# Altium PCB DS131-1.0-ApH传感器.PcbDoc
Units mm, origin at the board's own origin, x right, y up, seen from the top; angles counter-clockwise.
Board outline 41 x 64 mm, 2 copper layers (Top Layer, Bottom Layer), stack 1.581 mm thick; 37 components, 37 nets, 183 pads, 131 vias.
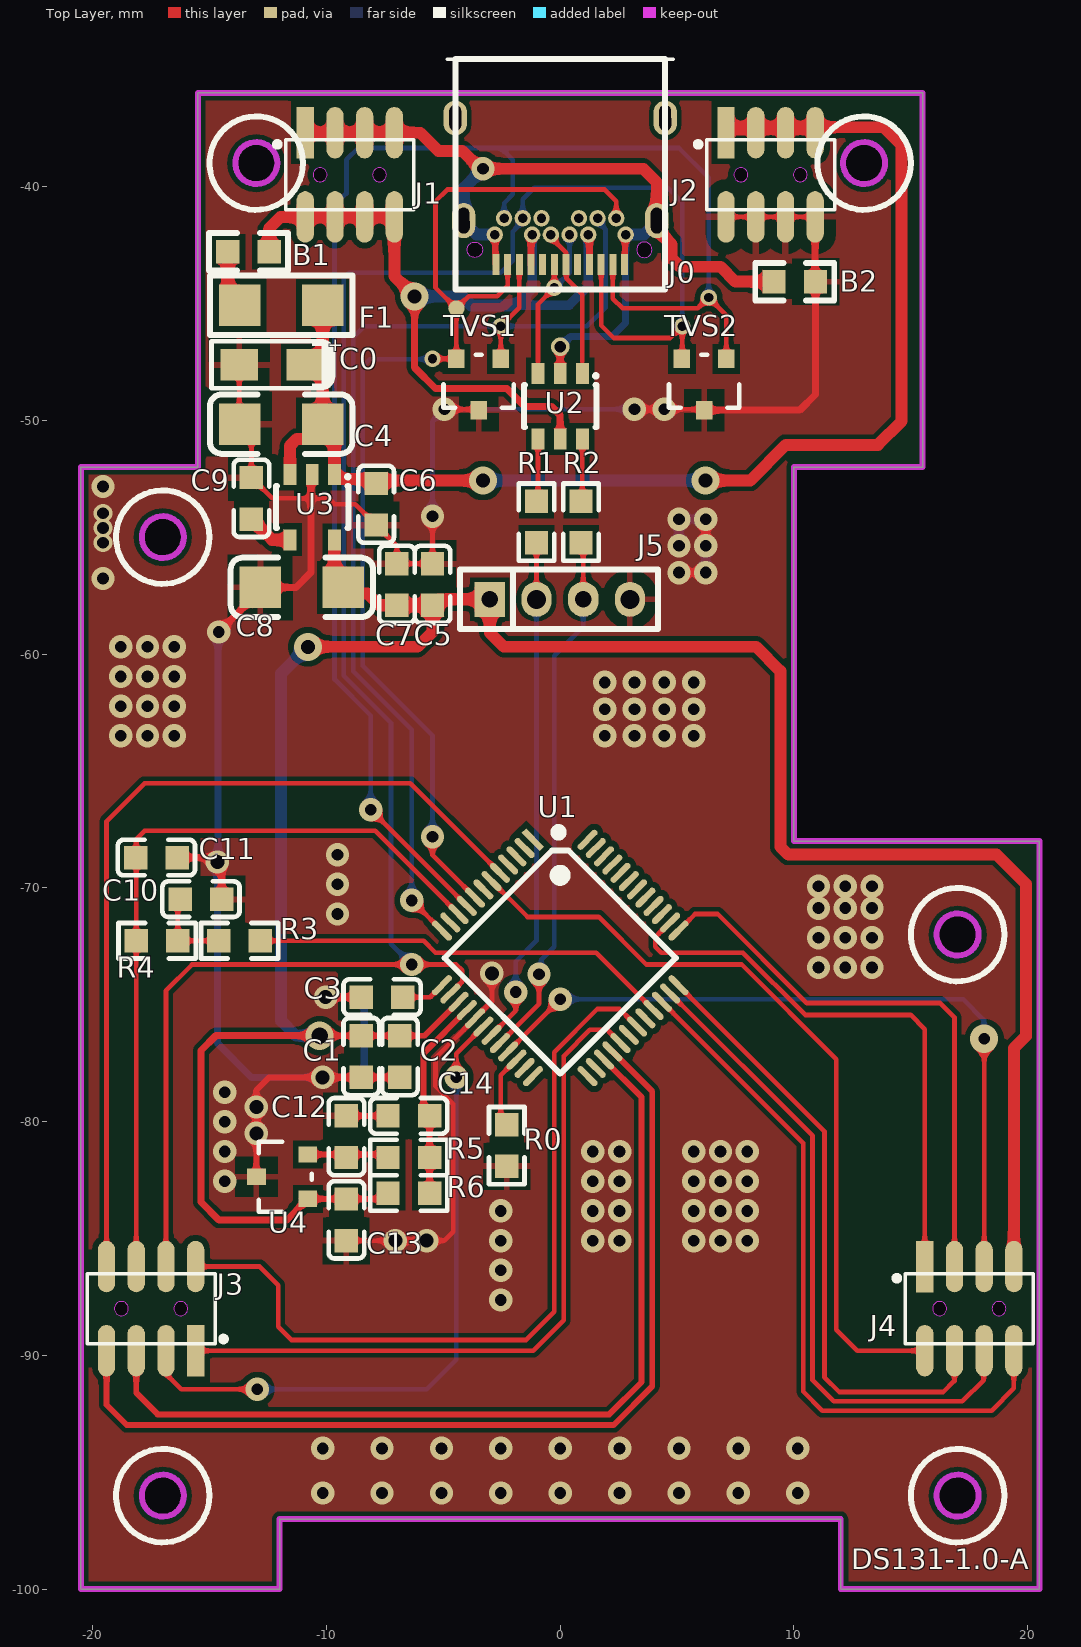
[diagram p0: Top Layer view]
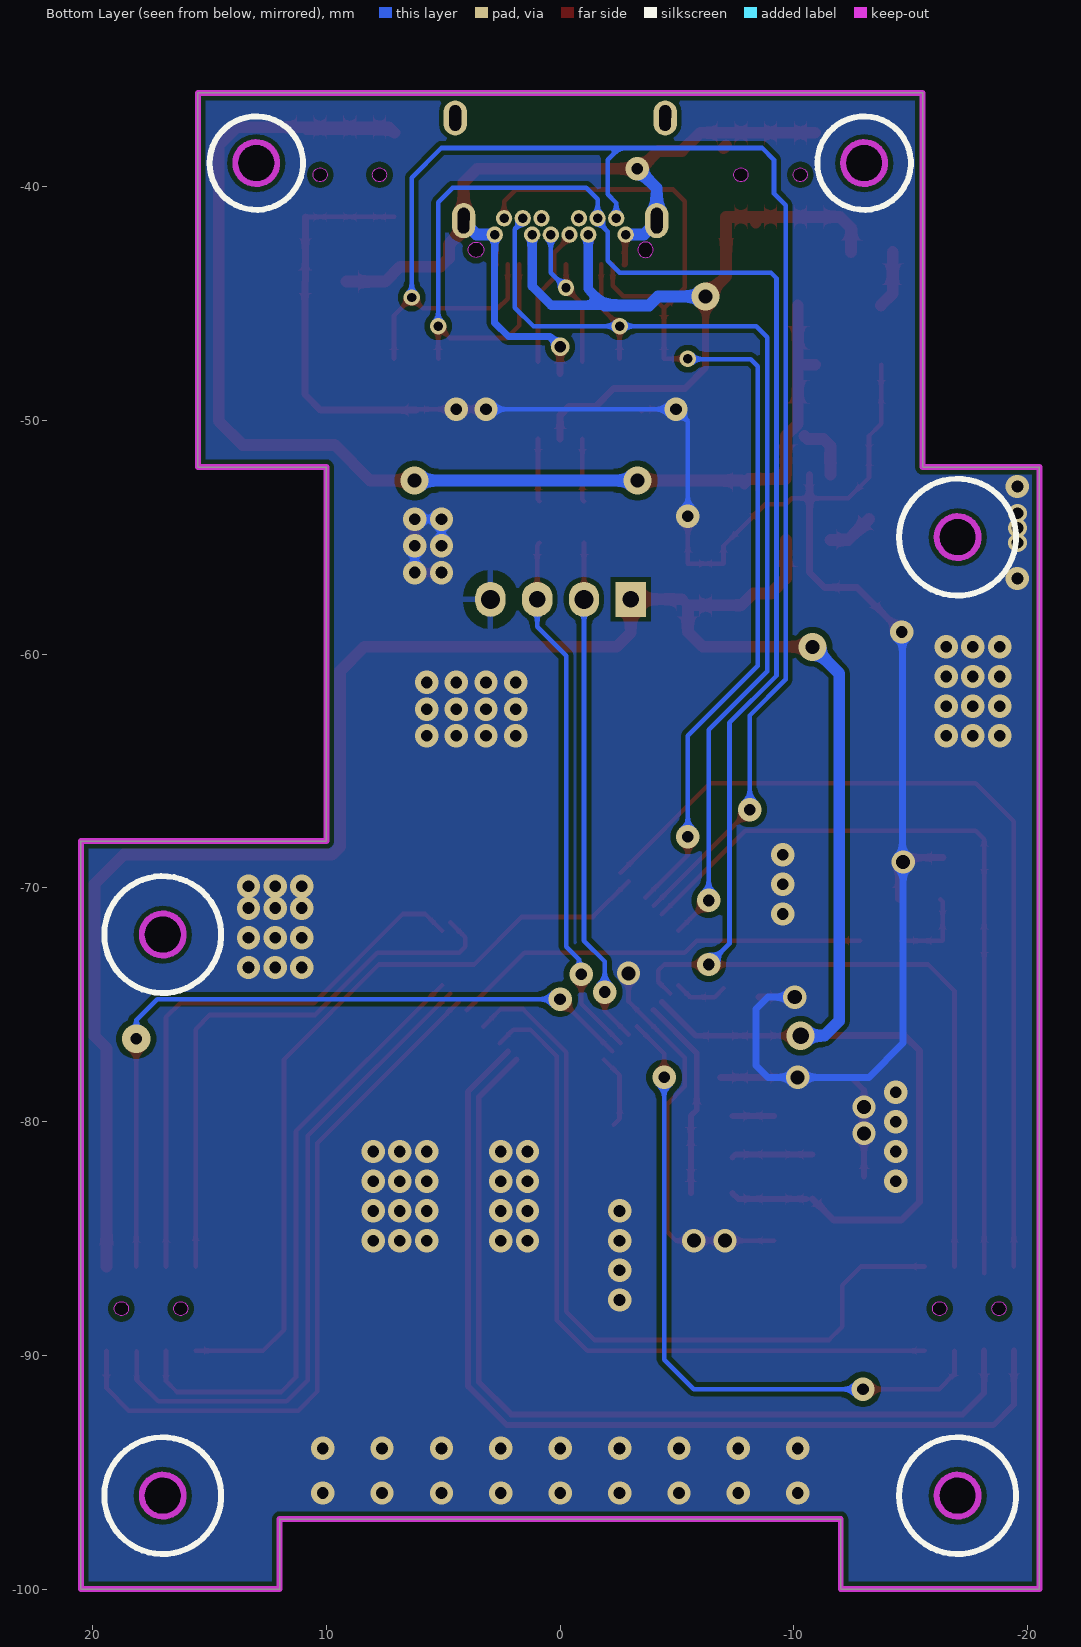
[diagram p1: Bottom Layer view, seen from below]
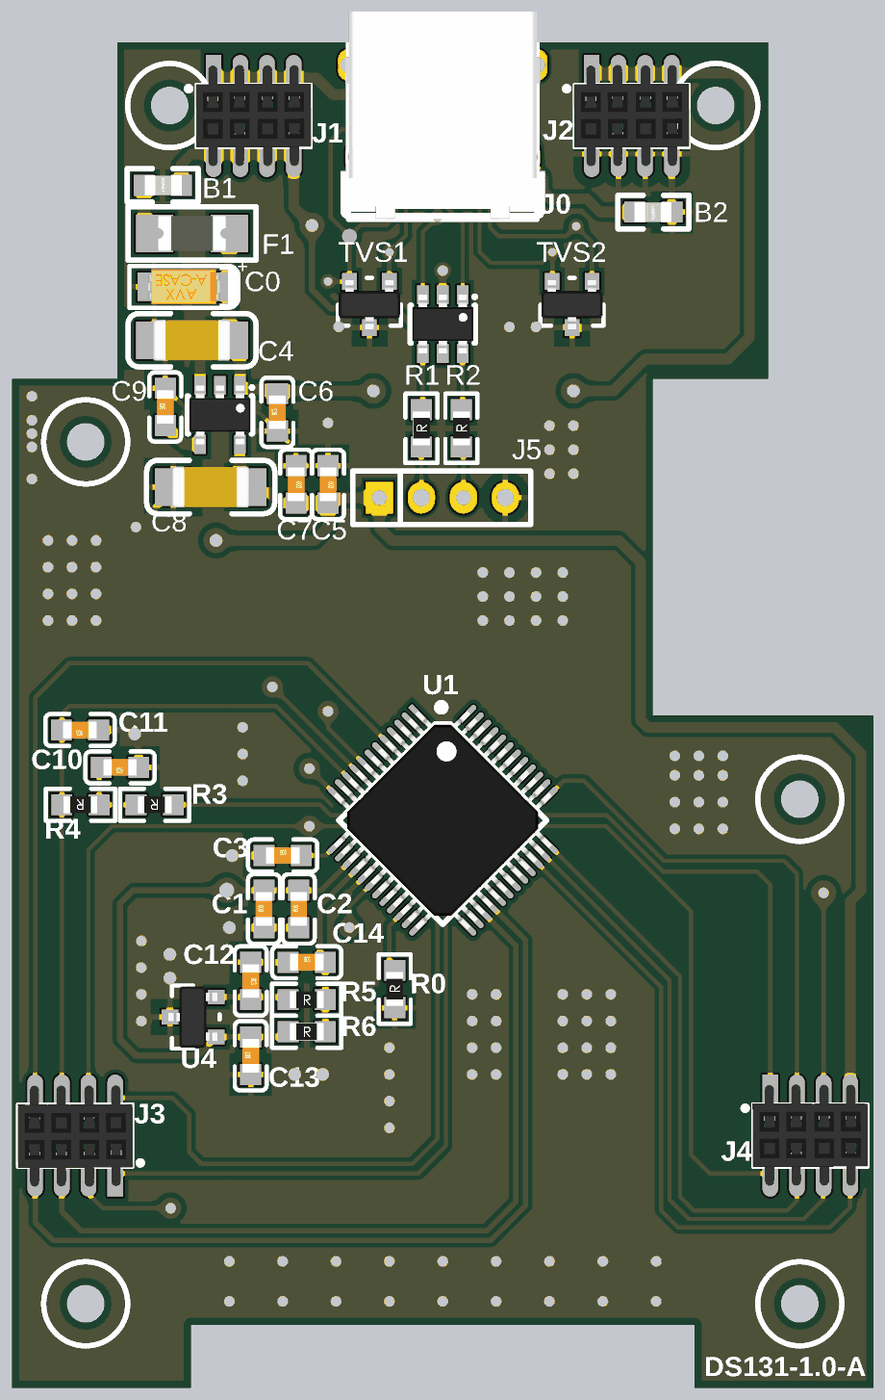
[diagram p2: 3D render of the assembled board from above, using the file's embedded part models]

## Layer stack, top to bottom
Top Solder: solder mask 0.0102, Solder Resist, Dk 3.5
Top Layer: signal copper 0.0356
Dielectric 1: dielectric 1.51, FR-4, Dk 4.8
Bottom Layer: signal copper 0.0356
Bottom Solder: solder mask 0.0102, Solder Resist, Dk 3.5

## Board outline
-20.5,-100 -20.5,-52 -15.5,-52 -15.5,-36 15.5,-36 15.5,-52 10,-52 10,-68 20.5,-68 20.5,-100 12,-100 12,-97 -12,-97 -12,-100
cut-out: -17.9,-55 ccw(c-17,-55) -17,-55.9 ccw(c-17,-55) -16.1,-55 ccw(c-17,-55) -17,-54.1 ccw(c-17,-55)
cut-out: 16.1,-96 ccw(c17,-96) 17,-96.9 ccw(c17,-96) 17.9,-96 ccw(c17,-96) 17,-95.1 ccw(c17,-96)
cut-out: -17.9,-96 ccw(c-17,-96) -17,-96.9 ccw(c-17,-96) -16.1,-96 ccw(c-17,-96) -17,-95.1 ccw(c-17,-96)
cut-out: 16.1,-72 ccw(c17,-72) 17,-72.9 ccw(c17,-72) 17.9,-72 ccw(c17,-72) 17,-71.1 ccw(c17,-72)
cut-out: 12.1,-39 ccw(c13,-39) 13,-39.9 ccw(c13,-39) 13.9,-39 ccw(c13,-39) 13,-38.1 ccw(c13,-39)
cut-out: -13.9,-39 ccw(c-13,-39) -13,-39.9 ccw(c-13,-39) -12.1,-39 ccw(c-13,-39) -13,-38.1 ccw(c-13,-39)

## Design rules (kind name [scope] priority, off if disabled: settings)
Clearance [All] p1: gap=0.254 ignorepadtopadclearanceinfootprint=FALSE except(0: Arc-Hole Track-Hole SMDPad-Hole THPad-Hole Via-Hole Fill-Hole Poly-Hole Region-Hole Text-Hole; 0.12: THPad-THPad; 0.15: Arc-SMDPad Arc-THPad Track-SMDPad Track-THPad SMDPad-SMDPad; 0.2: Arc-Arc Arc-Track Arc-Via Arc-Fill Arc-Poly Arc-Region Arc-Text Track-Track Track-Via Track-Fill Track-Poly Track-Region Track-Text SMDPad-THPad SMDPad-Text THPad-Fill THPad-Poly THPad-Region)
MinimumSolderMaskSliver [All] p1: minsoldermaskwidth=0.2
PlaneConnect [All] p1: planeconnectstyle=Relief reliefexpansion=0.508 reliefentries=4 reliefconductorwidth=0.254 reliefairgap=0.508
PolygonConnect GND [All] p1: thpad.connectstyle=Relief thpad.reliefconductorwidth=0.254 thpad.reliefentries=4 thpad.polygonreliefangle="90 Angle" thpad.airgapwidth=0.508 smdpad.connectstyle=Relief smdpad.reliefconductorwidth=0.254 smdpad.reliefentries=4 smdpad.polygonreliefangle="90 Angle" smdpad.airgapwidth=0.508 via.connectstyle=Direct via.reliefconductorwidth=0.254 via.reliefentries=4 via.polygonreliefangle="90 Angle" via.airgapwidth=0.254
PolygonConnect VSS [InNet('VSS') vs InNet('VSS')] p2: thpad.connectstyle=Relief thpad.reliefconductorwidth=0.508 thpad.reliefentries=4 thpad.polygonreliefangle="90 Angle" thpad.airgapwidth=0.508 smdpad.connectstyle=Relief smdpad.reliefconductorwidth=0.508 smdpad.reliefentries=4 smdpad.polygonreliefangle="90 Angle" smdpad.airgapwidth=0.508 via.connectstyle=Direct via.reliefconductorwidth=0.508 via.reliefentries=4 via.polygonreliefangle="90 Angle" via.airgapwidth=0.254
RoutingVias [All] p1: holewidth=0.6 width=1 viastyle="Through Hole" minholewidth=0.4 minwidth=0.8 maxholewidth=1 maxwidth=2
SilkToSilkClearance [All] p1: silktosilkclearance=0.1
SilkToSolderMaskClearance [IsPad] p1: minsilkscreentomaskgap=0.05 clearancetoexposedcopper=TRUE
SolderMaskExpansion [All] p1: expansion=0.102 istentingtop=FALSE
Width [All] p1: maxlimit=1 minlimit=0.2 preferedwidth=0.2
26 further rules are at their usual default settings.

## Classes and differential pairs
net class C14_Nets: ADC_Vref GND
net class U4_Nets: GND VCC_3V3_MCU VDD_2V5
net class R6_Nets: ADC_Vref VCC_3V3_MCU
net class R5_Nets: ADC_Vref VDD_2V5
net class C13_Nets: GND VCC_3V3_MCU
net class C12_Nets: GND VDD_2V5
net class R0_Nets: GND P3.3
net class C0_Nets: GND VCC_5V
net class J2_Nets: Dis_red_EN GND VCC_5V
net class U1_Nets: ADC0 ADC1 ADC_Vref DAC_OUT Dis1_red_EN Dis2_green_EN Dis3_blue_EN GND I2C1_SCL I2C1_SDA KEY_HOME NetU1_7 NetU1_10 P3.0/D-/RxD P3.1/D+/TxD P3.3 PWM SPI1/SPI2_CS SPI1_MISO SPI1_MOSI SPI1_SCK SPI2_MISO SPI2_MOSI SPI2_SCK UCAP USART2_RXD USART2_TXD VCC_3V3_MCU
net class TVS2_Nets: GND SPI1/SPI2_CS SPI1_SCK
net class J4_Nets: ADC1 Dis1_red_EN Dis2_green_EN Dis3_blue_EN I2C1_SCL I2C1_SDA KEY_HOME VCC_3V3_MCU
net class J0_Nets: D+_I/O1 D-_I/O2 NetJ0_A5 NetJ0_A8 NetJ0_B5 NetJ0_B8 SPI1/SPI2_CS SPI1_MISO SPI1_MOSI SPI1_SCK VBUS VSS
net class F1_Nets: NetB1_2 VCC_5V
net class C7_Nets: GND VCC_3V3_MCU
net class C4_Nets: GND VCC_5V
net class B2_Nets: GND VSS
net class B1_Nets: NetB1_2 VBUS
net class J3_Nets: ADC0 DAC_OUT SPI1/SPI2_CS SPI2_MISO SPI2_MOSI SPI2_SCK USART2_RXD USART2_TXD
net class U3_Nets: GND NetC9_1 VCC_3V3_MCU VCC_5V
net class R4_Nets: DAC_OUT NetC10_2
net class R2_Nets: P3.1/D+/TxD USB_D+
net class R1_Nets: P3.0/D-/RxD USB_D-
net class R3_Nets: NetC10_2 PWM
net class J1_Nets: VBUS VSS
net class J5_Nets: GND P3.0/D-/RxD P3.1/D+/TxD VCC_3V3_MCU
net class U2_Nets: D+_I/O1 D-_I/O2 USB_D+ USB_D- VBUS VSS
net class TVS1_Nets: GND SPI1_MISO SPI1_MOSI
net class C10_Nets: GND NetC10_2
net class C3_Nets: GND UCAP
net class C1_Nets: GND VCC_3V3_MCU
net class C5_Nets: GND VCC_3V3_MCU
net class C11_Nets: DAC_OUT GND
net class C9_Nets: GND NetC9_1
net class C8_Nets: GND VCC_3V3_MCU
net class C6_Nets: GND VCC_5V
net class C2_Nets: GND VCC_3V3_MCU

## Components (designator, comment, footprint, x,y, rotation, side; value= is the part's Value field where it differs from the comment)
B1 "CBM160808U102" 0603Bead -13.335,-42.799 r180 top
B2 "CBM160808U102" 0603Bead 10.033,-44.069 r0 top
C0 "AVX_10uF/16V ±10％(C106)" AVX_3216-18(1206)_SMD -12.319,-47.625 r180 top value=10uF
C1 "SMDCAP00013" 0603CAP -8.509,-77.217 r90 top value=100nF
C2 "SMDCAP00012" 0603CAP -6.858,-77.217 r90 top value=4.7uF
C3 "SMDCAP00015" 0603CAP -7.62,-74.676 r0 top value=1uF
C4 "MLCC 10uF 50V ±20％ 1206" 1206CAP -11.938,-50.165 r0 top value=10uF
C5 "SMDCAP00013" 0603CAP -5.461,-57.022 r270 top value=100nF
C6 "SMDCAP00015" 0603CAP -7.874,-53.593 r90 top value=1uF
C7 "SMDCAP00015" 0603CAP -6.985,-57.022 r270 top value=1uF
C8 "MLCC 10uF 50V ±20％ 1206" 1206CAP -11.049,-57.149 r0 top value=10uF
C9 "SMDCAP00010" 0603CAP -13.208,-53.34 r90 top value=10nF
C10 "SMDCAP00013" 0603CAP -15.366,-70.485 r180 top value=100nF
C11 "SMDCAP00013" 0603CAP -17.272,-68.707 r180 top value=100nF
C12 "SMDCAP00013" 0603CAP -9.144,-80.644 r270 top value=100nF
C13 "SMDCAP00013" 0603CAP -9.144,-84.202 r90 top value=100nF
C14 "SMDCAP00013" 0603CAP -6.477,-79.756 r0 top value=100nF
F1 "SMD1206-050C-16V" 1206FUSE -11.938,-45.085 r0 top value="16V /0.5A"
J0 "USB_Type_C_24P" USB_TYPE_C_24P_Receptacle 0,-40.2 r180 top locked
J1 "X1321FVS-2x04-C43D48" X1321FVS-2X04-C43D48 -9,-39.5 r0 top locked value=2*4P
J2 "X1321FVS-2x04-C43D48" X1321FVS-2X04-C43D48 9,-39.5 r0 top locked value=2*4P
J3 "X1321FVS-2x04-C43D48" X1321FVS-2X04-C43D48 -17.5,-88 r180 top locked value=2*4P
J4 "X1321FVS-2x04-C43D48" X1321FVS-2X04-C43D48 17.5,-88 r0 top locked value=2*4P
J5 "DIP4单排直针  间距2mm 针长11mm 铜" H4 -3.016,-57.658 r0 top value=4P
R0 "Chip 0R 1/16W ±1％ 0603" 0603RES -2.286,-81.026 r90 top value=0R
R1 "Chip 22R 1/16W ±1％ 0603" 0603RES -1.016,-54.356 r90 top value=22R
R2 "Chip 22R 1/16W ±1％ 0603" 0603RES 0.889,-54.356 r90 top value=22R
R3 "SMDRES00090" 0603RES -13.716,-72.263 r180 top value=3.3K
R4 "SMDRES00090" 0603RES -17.246,-72.263 r180 top value=3.3K
R5 "Chip 0R 1/16W ±1％ 0603" 0603RES -6.477,-81.534 r0 top value=0R
R6 "Chip 0R 1/16W ±1％ 0603" 0603RES -6.477,-83.058 r0 top value=0R
TVS1 "MMBZ9V1A" SOT23 -3.49,-48.471 r180 top
TVS2 "MMBZ9V1A" SOT23 6.157,-48.471 r180 top
U1 "STC32G12K128_35I LQFP48" LQFP-48 0,-73 r315 top locked value=STC32G12K128
U2 "82400102" SOT23-6 0,-49.4 r180 top
U3 "ME6211C33M5G-N" SOT23-5 -10.607,-53.717 r180 top
U4 "REF3025" SOT23 -11.895,-82.357 r90 top value=丝印R30C

## Footprints (in the part's own frame and the unit in brackets; to place one, negate y for a bottom-side part, rotate by r counter-clockwise, add the part's x,y. Pads: shape width x height; smd on the part's side, far side on the other; paste and mask are expansions set on the pad)
0603Bead [mm]
  rect 1x1 smd: 1(-0.889,0) 2(0.889,0)
  silkscreen extent -1.69,-0.8 1.69,0.8, body extent -0.9,-0.48 0.85,0.48, height 0.95
0603CAP [mm]
  rect 1x1 smd: 1(-0.889,0) 2(0.89,0)
  silkscreen extent -1.65,-0.76 1.65,0.76, body extent -0.8,-0.4 0.8,0.4, height 0.3
0603RES [mm]
  rect 1x1 smd: 1(-0.889,0) 2(0.889,0)
  silkscreen extent -1.65,-0.76 1.65,0.76, body extent -0.8,-0.41 0.8,0.41, height 0.51
1206CAP [mil]
  rect 70x70 smd: 1(-70,0) 2(70,0)
  silkscreen extent -120,-50 120,50, body extent -73,-38 73,38, height 47
1206FUSE [mil]
  rect 70x70 smd: 1(-70,0) 2(70,0)
  silkscreen extent -120,-50 120,50, body extent -63,-33 63,33, height 57
AVX_3216-18(1206)_SMD [mm]
  rect 1.6x1.35 smd: 1(-1.41,0) 2(1.41,0)
  silkscreen extent -2.6,-1 2.6,1, body extent -1.7,-0.84 1.7,0.84, height 1.71
H4 [mm]
  rect 1.3x1.5 hole 0.7: 1(0,0)
  oval 1.3x1.5 hole 0.813: 2(2,0) 4(6,0)
  oval 1.3x1.5 hole 0.7: 3(4,0)
  silkscreen extent -1.27,-1.27 7.2,1.27
LQFP-48 [mm]
  rect 1.1x0.27 smd mask+0.08: 1(-4.4,2.75)
  oval 1.1x0.27 smd mask+0.08: 2(-4.4,2.25) 3(-4.4,1.75) 4(-4.4,1.25) 5(-4.4,0.75) 6(-4.4,0.25) 7(-4.4,-0.25) 8(-4.4,-0.75) 9(-4.4,-1.25) 10(-4.4,-1.75) 11(-4.4,-2.25) 12(-4.4,-2.75) 25(4.4,-2.75) 26(4.4,-2.25) 27(4.4,-1.75) 28(4.4,-1.25) 29(4.4,-0.75) 30(4.4,-0.25) 31(4.4,0.25) 32(4.4,0.75) 33(4.4,1.25) 34(4.4,1.75) 35(4.4,2.25) 36(4.4,2.75)
  oval 0.27x1.1 smd mask+0.08: 13(-2.75,-4.4) 14(-2.25,-4.4) 15(-1.75,-4.4) 16(-1.25,-4.4) 17(-0.75,-4.4) 18(-0.25,-4.4) 19(0.25,-4.4) 20(0.75,-4.4) 21(1.25,-4.4) 22(1.75,-4.4) 23(2.25,-4.4) 24(2.75,-4.4) 37(2.75,4.4) 38(2.25,4.4) 39(1.75,4.4) 40(1.25,4.4) 41(0.75,4.4) 42(0.25,4.4) 43(-0.25,4.4) 44(-0.75,4.4) 45(-1.25,4.4) 46(-1.75,4.4) 47(-2.25,4.4) 48(-2.75,4.4)
  silkscreen extent -3.95,-3.5 3.5,3.85, body extent -4.51,-4.5 4.5,4.5, height 1.54
SOT23 [mm]
  rect 0.7x0.8 smd: 1(-0.95,-1.1) 2(0.95,-1.1) 3(0,1.1)
  silkscreen extent -1.5,-1.27 1.5,1, body extent -1.46,-1.17 1.46,1.17, height 1
SOT23-5 [mm] "SOT-23/SC-74A; 5 Leads; Body 3.1 x 3 mm, inc. leads (LxW max)"
  rect 0.55x0.9 smd: 1(-0.95,-1.4) 2(0,-1.4) 3(0.95,-1.4) 4(0.95,1.4) 5(-0.95,1.4)
  silkscreen extent -1.59,-1.36 1.55,0.9, body extent -1.45,-1.4 1.45,1.4, height 1.45
SOT23-6 [mm] "SOT-23/SC-74A; 5 Leads; Body 3.1 x 3 mm, inc. leads (LxW max)"
  rect 0.55x0.9 smd: 1(-0.95,-1.4) 2(0,-1.4) 3(0.95,-1.4) 4(0.95,1.4) 5(0,1.4) 6(-0.95,1.4)
  silkscreen extent -1.59,-1.36 1.55,0.9, body extent -1.45,-1.4 1.45,1.4, height 1.45
USB_TYPE_C_24P_Receptacle [mm]
  oval 1x1.5 hole 0.5 slot 1.1 at 90.5 deg: 0(-4.49,-3.13) 0(-4.13,1.26) 0(4.13,1.26) 0(4.49,-3.13)
  rect 0.3x0.9 smd mask+0.1: A1(-2.75,3.13) A2(-2.25,3.13) A3(-1.75,3.13) A4(-1.25,3.13) A5(-0.75,3.13) A6(-0.25,3.13) A7(0.25,3.13) A8(0.75,3.13) A9(1.25,3.13) A10(1.75,3.13) A11(2.25,3.13) A12(2.75,3.13)
  round 0.7 hole 0.4: B1(2.8,1.86) B2(2.4,1.16) B3(1.6,1.16) B4(1.2,1.86) B5(0.8,1.16) B6(0.4,1.86) B7(-0.4,1.86) B8(-0.8,1.16) B9(-1.2,1.86) B10(-1.6,1.16) B11(-2.4,1.16) B12(-2.8,1.86)
  Keep-Out Layer board cut-out: -3.93,2.51 -3.905,2.384 -3.833,2.277 -3.726,2.205 -3.6,2.18 -3.6,2.18 -3.474,2.205 -3.367,2.277 -3.295,2.384 -3.27,2.51 -3.27,2.51 -3.295,2.636 -3.367,2.743 -3.474,2.815 -3.6,2.84 -3.6,2.84 -3.726,2.815 -3.833,2.743 -3.905,2.636 -3.93,2.51
  Keep-Out Layer board cut-out: 3.98,2.51 3.955,2.384 3.883,2.277 3.776,2.205 3.65,2.18 3.65,2.18 3.524,2.205 3.417,2.277 3.345,2.384 3.32,2.51 3.32,2.51 3.345,2.636 3.417,2.743 3.524,2.815 3.65,2.84 3.65,2.84 3.776,2.815 3.883,2.743 3.955,2.636 3.98,2.51
  silkscreen extent -4.48,-5.66 4.48,4.21, body extent -4.87,-5.66 4.88,4.21, height 3.36
X1321FVS-2X04-C43D48 [mm]
  rect 0.74x2.2 smd: 1(-1.905,1.8)
  oval 0.74x2.2 smd: 2(-1.905,-1.8) 3(-0.635,1.8) 4(-0.635,-1.8) 5(0.635,1.8) 6(0.635,-1.8) 7(1.905,1.8) 8(1.905,-1.8)
  Keep-Out Layer board cut-out: -1.57,0 -1.547,-0.115 -1.482,-0.212 -1.385,-0.277 -1.27,-0.3 -1.27,-0.3 -1.155,-0.277 -1.058,-0.212 -0.993,-0.115 -0.97,0 -0.97,0 -0.993,0.115 -1.058,0.212 -1.155,0.277 -1.27,0.3 -1.27,0.3 -1.385,0.277 -1.482,0.212 -1.547,0.115 -1.57,0
  Keep-Out Layer board cut-out: 1.57,0 1.547,0.115 1.482,0.212 1.385,0.277 1.27,0.3 1.27,0.3 1.155,0.277 1.058,0.212 0.993,0.115 0.97,0 0.97,0 0.993,-0.115 1.058,-0.212 1.155,-0.277 1.27,-0.3 1.27,-0.3 1.385,-0.277 1.482,-0.212 1.547,-0.115 1.57,0
  silkscreen extent -3.2,-1.5 2.74,1.5, body extent -2.75,-2.39 2.74,2.44, height 4.54

## Part data
B1 B2: library part "Chip Ferrite Bead 0606", "贴片磁珠"
C0: "钽电容"
C1 C5 C10 C11 C12 C13 C14: library part "MLCC 100nF 50V ±10％ 0603", "贴片电容"
C2: library part "MLCC 4.7uF 50V ±10％ 0603", "贴片电容"
C3 C6 C7: library part "MLCC 1uF 50V ±10％ 0603", "贴片电容"
C4 C8: "贴片电容"
C9: library part "MLCC 10nF 50V ±10％ 0603", "贴片电容"
F1: "贴片自恢复保险丝 16V /0.5A"
J1 J2 J3 J4: "双排母2x4P 立贴 1.27mm"
J5: "单排直针"
R0 R1 R2 R5 R6: "贴片电阻"
R3 R4: library part "Chip 3.3K 1/16W ±1％ 0603", "贴片电阻"
TVS1 TVS2: library part TVS, "瞬态抑制二极管"
U1: "单片机芯片"
U2: "瞬态抑制二极管(TVS)"
U3: "稳压芯片"

## Free pads (board coordinates)
  round 0.7 smd mask+0.102: 2(-4.44,-45.217)

## Via types
v1: diameter 1, hole 0.5, Top Layer to Bottom Layer, tented both sides, 108 vias
v2: diameter 1, hole 0.6, Top Layer to Bottom Layer, tented both sides, 8 vias
v3: diameter 0.7, hole 0.4, Top Layer to Bottom Layer, tented both sides, 5 vias
v4: diameter 1.2, hole 0.6, Top Layer to Bottom Layer, tented both sides, 4 vias
v5: diameter 0.8, hole 0.5, Top Layer to Bottom Layer, tented both sides, 4 vias
v6: diameter 1.2, hole 0.7, Top Layer to Bottom Layer, tented both sides, 1 vias
v7: diameter 1.2, hole 0.5, Top Layer to Bottom Layer, tented both sides, 1 vias

## Nets (pads, with @x,y where several pads share a name; then routed paths per layer and width w, separated by ;. In a path a pad name is that pad's centre, name@x,y a point inside that pad or via, vN(x,y) a via of type N, cw(c..) or ccw(c..) an arc to the next point about the centre after c; other vN are vias at no path point)
ADC0: J3.8 U1.5 | length 38.1
  Top Layer w0.2: J3.8 -19.405,-67.157 -17.78,-65.532 -6.407,-65.532 U1.5
ADC1: J4.2 U1.6 | length 33.6
  Top Layer w0.2: U1.6 -1.399,-71.247 1.651,-71.247 3.683,-73.279 7.759,-73.279 11.811,-77.331 11.811,-88.899 12.712,-89.8 J4.2
ADC_Vref: C14.2 R5.2 R6.2 U1.16 | length 8.7
  Top Layer w0.254: R6.2 -5.587,-83.057 -5.587,-81.534 C14.2 -5.842,-79.501 -5.842,-77.074 U1.16
D+_I/O1: J0.A6 J0.B6 U2.1 | length 6
  Top Layer w0.2: J0.B6 -0.4,-42.179 0.25,-42.829 J0.A6 0.266,-43.346 0.266,-43.93 0.95,-44.613 0.95,-47.498
D-_I/O2: J0.A7 J0.B7 U2.3 | length 7
  Top Layer w0.2: -0.95,-47.498 -0.95,-45.032 v3(-0.25,-44.332) J0.A7
  Bottom Layer w0.2: v3(-0.25,-44.332) 0.4,-43.682 J0.B7
DAC_OUT: C11.2 J3.6 R4.2 U1.10 | length 34
  Top Layer w0.2: J3.6@-18.135,-86.487 J3.6 R4.2 -18.135,-67.919 -17.78,-67.564 -7.911,-67.564 U1.10
Dis1_red_EN: J4.6 U1.35 | length 28.4
  Top Layer w0.2: U1.35 10.795,-80.613 10.795,-91.058 11.703,-91.966 17.2,-91.966 18.112,-91.054 J4.6@18.112,-89.823
Dis2_green_EN: J4.8 U1.34 | length 30.5
  Top Layer w0.2: U1.34 10.393,-80.918 10.393,-91.545 11.214,-92.366 18.451,-92.366 19.405,-91.412 J4.8
Dis3_blue_EN: J4.4 U1.36 | length 26.7
  Top Layer w0.2: U1.36 11.303,-80.414 11.303,-90.931 11.938,-91.566 16.391,-91.566 16.865,-91.092 J4.4
GND: B2.2 C0.2 C1.1 C2.1 C3.1 C4.1 C5.1 C6.1 C7.1 C8.1 C9.2 C10.1 C11.1 C12.1 C13.1 C14.1 J2.2 J2.4 J2.6 J2.8 J5.4 R0.1 TVS1.3 TVS2.3 U1.17 U3.2 U4.3 | length 128.5
  Top Layer w0.2: C0.2 -13.729,-50.152 C4.1 -13.208,-50.673 C9.2 -12.318,-53.34 -10.668,-53.34 -9.906,-53.34 -9.652,-53.594 -8.762,-53.594 C6.1 -6.985,-55.371 C7.1 C5.1 v1(-5.461,-54.102) ; C13.1 -4.954,-85.091 -4.572,-84.709 -4.572,-79.248 -5.334,-78.486 -5.334,-77.273 U1.17 -2.921,-74.86 v2(-2.921,-73.66) ; v1(-4.953,-49.53) -3.531,-49.53 TVS1.3 TVS1.3@-3.49,-49.621 ; v1(3.175,-49.53) v1(4.445,-49.53) 6.116,-49.53 TVS2.3 ; J2.2 J2.4 J2.6 J2.8
  Top Layer w0.254: U4.3 -12.995,-78.654 -12.447,-78.106 v2(-10.159,-78.106) ; C12.1 -9.143,-79.756 C14.1 ; v1(5.08,-56.515) v1(6.223,-56.515) ; v1(6.223,-55.372) v1(6.223,-54.229)
  Top Layer w0.3: C11.1 -14.859,-68.707 -14.477,-69.089 C10.1 ; v1(-14.605,-59.055) -12.7,-57.15 -11.303,-57.15 -10.668,-56.515 -10.668,-53.34 U3.2@-10.668,-52.317 ; v2(-10.159,-78.106) C2.1 ; v2(-10.033,-74.676) C3.1 ; TVS2.3 10.246,-49.571 10.922,-48.895 B2.2 10.905,-44.052 J2.8
  Bottom Layer w0.2: v1(-5.461,-54.102) -5.461,-50.038 v1(-4.953,-49.53) v1(3.175,-49.53)
  Bottom Layer w0.254: v1(5.08,-55.372) v1(5.08,-54.229) v1(6.223,-54.229) ; v1(6.223,-56.515) v1(6.223,-55.372)
  Bottom Layer w0.3: v1(-14.605,-59.055) -14.636,-59.086 -14.636,-68.866 v2(-14.668,-68.898) -14.668,-76.645 -13.207,-78.106 v2(-10.159,-78.106) -8.891,-78.106 -8.382,-77.597 -8.382,-75.184 -8.89,-74.676 v2(-10.033,-74.676)
  other v1: -10.16,-95.885 -7.62,-95.885 -5.08,-95.885 -2.54,-95.885 0,-95.885 2.54,-95.885 5.08,-95.885 7.62,-95.885 10.16,-95.885 -10.16,-93.98 -7.62,-93.98 -5.08,-93.98 -2.54,-93.98 0,-93.98 2.54,-93.98 5.08,-93.98 7.62,-93.98 10.16,-93.98 -2.54,-87.63 -2.54,-86.36 -2.54,-85.09 1.397,-85.09 2.54,-85.09 5.715,-85.09 6.858,-85.09 8.001,-85.09 -2.54,-83.82 1.397,-83.82 2.54,-83.82 5.715,-83.82 6.858,-83.82 8.001,-83.82 -14.351,-82.55 1.397,-82.55 2.54,-82.55 5.715,-82.55 6.858,-82.55 8.001,-82.55 -14.351,-81.28 1.397,-81.28 2.54,-81.28 5.715,-81.28 6.858,-81.28 8.001,-81.28 -14.351,-80.01 -14.351,-78.74 11.049,-73.406 12.192,-73.406 13.335,-73.406 11.049,-72.136 12.192,-72.136 13.335,-72.136 -9.525,-71.12 11.049,-70.866 12.192,-70.866 13.335,-70.866 11.049,-69.935 12.192,-69.935 13.335,-69.935 -9.525,-69.85 -9.525,-68.58 -18.796,-63.5 -17.653,-63.5 -16.51,-63.5 1.905,-63.5 3.175,-63.5 4.445,-63.5 5.715,-63.5 1.905,-62.357 3.175,-62.357 4.445,-62.357 5.715,-62.357 -18.796,-62.23 -17.653,-62.23 -16.51,-62.23 1.905,-61.214 3.175,-61.214 4.445,-61.214 5.715,-61.214 -18.796,-60.96 -17.653,-60.96 -16.51,-60.96 -18.796,-59.69 -17.653,-59.69 -16.51,-59.69 -19.558,-56.769 -19.558,-52.832
  other v2: -7.049,-85.091 -5.715,-85.09 -12.995,-80.505 -12.995,-79.375
  other v5: -19.558,-55.245 -19.558,-54.61 -19.558,-53.975
I2C1_SCL: J4.1 U1.38 | length 24.4
  Top Layer w0.2: U1.38 4.064,-72.118 4.064,-72.517 4.318,-72.771 7.816,-72.771 10.483,-75.438 14.986,-75.438 15.595,-76.047 J4.1
I2C1_SDA: J4.3 U1.37 | length 24.6
  Top Layer w0.2: U1.37 5.769,-71.12 6.731,-71.12 10.541,-74.93 16.256,-74.93 16.865,-75.539 J4.3
KEY_HOME: J4.5 U1.21 | length 32.2
  Top Layer w0.2: U1.21 v1(0.005,-74.763) ; J4.5 v7(18.135,-76.457)
  Bottom Layer w0.2: v1(0.005,-74.763) 17.232,-74.763 18.126,-75.657 18.126,-76.448 v7(18.135,-76.457)
NetB1_2: B1.2 F1.1 | length 2.5
  Top Layer w0.508: B1.2 -14.224,-44.577 F1.1
NetC9_1: C9.1 U3.4 | length 2
  Top Layer w0.508: C9.1 -12.32,-55.117 U3.4
NetC10_2: C10.2 R3.2 R4.1 | length 3.6
  Top Layer w0.2: C10.2 -16.357,-70.586 R4.1 R3.2
P3.0/D-/RxD: J5.2 R1.1 U1.19 | length 21.8
  Top Layer w0.2: U1.19 -1.905,-75.259 v1(-1.905,-74.459) ; J5.2 R1.1
  Bottom Layer w0.2: v1(-1.905,-74.459) -1.905,-73.152 -1.016,-72.263 J5.2
P3.1/D+/TxD: J5.3 R2.1 U1.20 | length 22.9
  Top Layer w0.2: U1.20 -0.905,-74.965 v1(-0.905,-73.703) ; R2.1 0.984,-55.34 J5.3
  Bottom Layer w0.2: v1(-0.905,-73.703) -0.807,-73.605 -0.807,-73.07 -0.254,-72.517 -0.254,-60.071 0.984,-58.833 J5.3
P3.3: R0.2 U1.22 | length 3.2
  Top Layer w0.2: R0.2 -2.54,-79.883 -2.54,-78.015 U1.22
PWM: R3.1 U1.33 | length 18.1
  Top Layer w0.2: R3.1 -5.842,-72.263 -5.334,-72.771 1.539,-72.771 U1.33
SPI1/SPI2_CS: J0.A3 J0.B3 J3.4 TVS2.2 U1.14 | length 87.6
  Top Layer w0.2: J3.4 -16.865,-74.396 -15.748,-73.279 v1(-6.35,-73.279) -4.445,-73.279 -4.191,-73.533 -4.191,-74.009 U1.14 ; J0.A3 1.75,-45.946 2.286,-46.482 4.713,-46.482 v3(5.221,-45.974) 5.221,-47.357 TVS2.2
  Bottom Layer w0.2: v1(-6.35,-73.279) -7.239,-72.39 -7.239,-62.934 -9.252,-60.921 -9.252,-43.923 -9.017,-43.688 -2.54,-43.688 -2.032,-43.18 -2.032,-41.927 -1.6,-41.495 J0.B3 -1.6,-40.551 -1.11,-40.061 4.605,-40.061 5.221,-40.677 v3(5.221,-45.974)
SPI1_MISO: J0.A11 J0.B11 pad.2 TVS1.2 U1.8 | length 48.4
  Top Layer w0.2: v1(-5.461,-67.818) -5.461,-68.6 U1.8 ; v3(-5.461,-47.371) TVS1.2 pad.2 ; J0.A11 -2.25,-44.249 -2.694,-44.693 -3.916,-44.693 pad.2 ; J0.B11 2.4,-40.627 1.905,-40.132 -4.826,-40.132 -5.334,-40.64 -5.334,-44.323 pad.2
  Bottom Layer w0.2: v1(-5.461,-67.818) -5.461,-63.5 -8.452,-60.509 -8.452,-47.695 -8.143,-47.386 -5.476,-47.386 v3(-5.461,-47.371)
SPI1_MOSI: J0.A10 J0.B10 TVS1.1 U1.12 | length 46.6
  Top Layer w0.2: v1(-6.35,-70.539) U1.12 ; TVS1.1 v3(-2.54,-45.974) -1.75,-45.184 J0.A10
  Bottom Layer w0.2: v1(-6.35,-70.539) -6.35,-63.246 -8.852,-60.744 -8.852,-46.444 -8.382,-45.974 v3(-2.54,-45.974) 1.143,-45.974 1.938,-45.179 1.938,-41.833 1.6,-41.495 J0.B10
SPI1_SCK: J0.A2 J0.B2 TVS2.1 U1.9 | length 68.1
  Top Layer w0.2: v1(-8.11,-66.657) U1.9 ; J0.A2 2.25,-44.795 2.667,-45.212 5.884,-45.212 v3(6.35,-44.746) 7.107,-45.503 TVS2.1
  Bottom Layer w0.2: v1(-8.11,-66.657) -8.11,-62.629 -9.652,-61.087 -9.652,-40.806 -9.144,-40.298 -9.144,-38.862 -8.636,-38.354 -2.54,-38.354 ; J0.B2 -2.4,-40.707 -2.032,-40.339 -2.032,-38.862 -2.54,-38.354 ; v3(6.35,-44.746) 6.35,-39.624 5.08,-38.354 -2.54,-38.354
SPI2_MISO: J3.1 U1.29 | length 30.7
  Top Layer w0.2: J3.1 -1.155,-89.8 0.146,-88.499 0.146,-77.197 1.27,-76.073 2.012,-76.073 U1.29
SPI2_MOSI: J3.3 U1.18 | length 28.9
  Top Layer w0.2: J3.3 -16.865,-90.793 -16.207,-91.451 v1(-12.954,-91.451) ; v1(-4.445,-78.105) -4.445,-77.091 U1.18
  Bottom Layer w0.2: v1(-12.954,-91.451) -5.715,-91.451 -4.445,-90.181 v1(-4.445,-78.105)
SPI2_SCK: J3.2 U1.31 | length 33.9
  Top Layer w0.2: J3.2 -12.859,-86.2 -12.065,-86.994 -12.065,-88.772 -11.497,-89.34 -1.457,-89.34 -0.254,-88.137 -0.254,-77.031 1.593,-75.184 2.538,-75.184 U1.31
UCAP: C3.2 U1.13 | length 2.3
  Top Layer w0.2: C3.2@-6.985,-74.295 -6.604,-74.676 -5.565,-74.676 U1.13
USART2_RXD: J3.5 U1.27 | length 38.8
  Top Layer w0.254: J3.5 -18.135,-91.604 -17.218,-92.521 2.098,-92.521 3.483,-91.136 ; U1.27 3.483,-78.958 3.483,-91.119
USART2_TXD: J3.7 U1.28 | length 41.7
  Top Layer w0.254: J3.7 -19.405,-92.112 -18.542,-92.975 2.286,-92.975 3.937,-91.324 3.937,-78.705 U1.28
USB_D+: R2.2 U2.6 | length 2.7
  Top Layer w0.2: R2.2 0.95,-53.406 U2.6
USB_D-: R1.2 U2.4 | length 2.7
  Top Layer w0.2: R1.2 -0.95,-53.401 U2.4
VBUS: B1.1 J0.A4 J0.A9 J0.B4 J0.B9 J1.2 J1.4 J1.6 J1.8 U2.5 | length 37.6
  Top Layer w0.254: J0.A9 J0.A9@-1.227,-43.307 ; J0.B4@-1.227,-42.087 J0.B4 ; J0.B9 J0.B9@1.227,-42.087
  Top Layer w0.3: v4(-6.223,-44.704) -6.223,-47.752 -5.334,-48.641 -2.286,-48.641 -1.524,-49.403 -0.381,-49.403 0,-49.784 U2.5 ; J0.A9 J0.B4@-1.25,-42.11 ; J0.A4 J0.B9@1.25,-42.11
  Top Layer w0.508: B1.1 -12.446,-41.783 -11.963,-41.3 J1.4 -8.472,-41.3 -8.365,-41.407 J1.6@-8.365,-41.546 ; J1.6 J1.8 -7.095,-43.832 v4(-6.223,-44.704)
  Bottom Layer w0.4: J0.B4 -1.2,-44.38 -1.905,-45.085 0.381,-45.085 1.2,-44.266 J0.B9
  Bottom Layer w0.508: v4(-6.223,-44.704) -4.191,-44.704 -3.81,-45.085 -1.905,-45.085
VCC_3V3_MCU: C1.2 C2.2 C5.2 C7.2 C8.2 C13.2 J4.7 J5.1 R6.1 U1.15 U3.5 U4.1 | length 110.7
  Top Layer w0.24: v6(-10.287,-76.327) C1.2 C2.2
  Top Layer w0.254: U4.1@-10.536,-83.307 -7.615,-83.307 R6.1 ; C2.2 -5.802,-76.327 U1.15
  Top Layer w0.3: U4.1 -11.689,-84.201 -14.605,-84.201 -15.367,-83.439 -15.367,-76.962 -14.732,-76.327 v6(-10.287,-76.327) ; C5.2 C5.2@-5.207,-57.658
  Top Layer w0.508: v4(-10.795,-59.69) -6.096,-59.69 -5.461,-59.055 C5.2 C7.2 -7.747,-57.912 -8.255,-57.404 -9.016,-57.404 C8.2 -9.657,-56.763 U3.5 ; C5.2@-5.207,-57.658 J5.1 -3.016,-59.087 -2.413,-59.69 8.382,-59.69 9.419,-60.727 9.419,-68.241 9.759,-68.581 18.67,-68.581 19.919,-69.83 19.919,-76.347 19.405,-76.861 J4.7
  Bottom Layer w0.508: v4(-10.795,-59.69) -11.938,-60.833 -11.938,-75.692 -11.303,-76.327 v6(-10.287,-76.327)
VCC_5V: C0.1 C4.2 C6.2 F1.2 J2.1 J2.3 J2.5 J2.7 U3.1 U3.3 | length 59.7
  Top Layer w0.2: J2.1 J2.3 J2.5 J2.7
  Top Layer w0.508: U3.3 -11.557,-51.098 -11.259,-50.8 -10.571,-50.8 C4.2@-10.444,-50.673 ; C0.1 C0.1@-10.16,-47.625 ; F1.2 C0.1@-10.16,-47.625 ; U3.1 -9.657,-50.668 C4.2 C0.1@-10.16,-47.625 ; U3.1@-9.636,-52.513 -8.064,-52.513 C6.2 -7.749,-52.578 v4(-3.302,-52.578) ; v4(6.223,-52.578) 8.128,-52.578 9.652,-51.054 13.589,-51.054 14.605,-50.038 14.605,-38.227 13.843,-37.465 7.33,-37.465 J2.1
  Bottom Layer w0.508: v4(-3.302,-52.578) v4(6.223,-52.578)
VDD_2V5: C12.2 R5.1 U4.2 | length 3.5
  Top Layer w0.254: U4.2 -7.493,-81.407 R5.1
VSS: B2.1 J0.0@4.13,-41.46 J0.0@-4.13,-41.46 J0.A1 J0.A12 J0.B1 J0.B12 J1.1 J1.3 J1.5 J1.7 U2.2 | length 40.8
  Top Layer w0.254: J0.B1 -2.773,-42.087 -2.773,-43.307 J0.A12 ; J0.A1 2.773,-43.307 2.773,-42.087 J0.B12
  Top Layer w0.3: U2.2 v5(0,-46.857)
  Top Layer w0.508: J1.1 J1.3 J1.5 J1.7 -5.988,-37.7 -5.207,-38.481 -4.196,-38.481 -3.434,-39.243 3.556,-39.243 4.13,-39.817 4.13,-41.46 4.13,-41.843 4.764,-42.478 4.764,-43.075 5.124,-43.434 6.858,-43.434 7.493,-44.069 B2.1 ; J1.7@-7.095,-38.25 J1.7@-6.988,-38.357
  Bottom Layer w0.254: J0.B1@-2.807,-42.053 J0.B1
  Bottom Layer w0.3: v5(0,-46.857) 0.433,-46.424 2.217,-46.424 2.8,-45.841 J0.B12
  Bottom Layer w0.508: J0.0@-4.13,-41.46 -4.13,-40.071 v1(-3.302,-39.243) ; J0.0@-4.123,-41.515 -3.578,-42.06 J0.B1 ; J0.B12 3.578,-42.06 J0.0@4.123,-41.515
pads on no net: J0.0@4.49,-37.07 J0.0@-4.49,-37.07 J0.A5 J0.A8 J0.B5 J0.B8 U1.1 U1.2 U1.3 U1.4 U1.7 U1.11 U1.23 U1.24 U1.25 U1.26 U1.30 U1.32 U1.39 U1.40 U1.41 U1.42 U1.43 U1.44 U1.45 U1.46 U1.47 U1.48

## Polygon pours and split planes (outlines as drawn)
GND on Bottom Layer "GND_L02_P000" (solid, remove dead copper, pour order 0): -20.5,-100 -20.5,-52 -15.5,-52 -15.5,-36 15.5,-36 15.5,-52 10,-52 10,-68 20.5,-68 20.5,-100 12,-100 12,-97 -12,-97 -12,-100
GND on Top Layer "GND_L01_P001" (solid, remove dead copper, pour order 1): -20.5,-100 -20.5,-52 -15.5,-52 -15.5,-36 15.5,-36 15.5,-52 10,-52 10,-68 20.5,-68 20.5,-100 12,-100 12,-97 -12,-97 -12,-100

## Keep-outs
Keep-Out Layer:
  circle w0.254: c-17,-96 r0.9
  circle w0.254: c17,-96 r0.9
  circle w0.254: c-17,-55 r0.9
  circle w0.254: c13,-39 r0.9
  circle w0.254: c-13,-39 r0.9
  circle w0.254: c17,-72 r0.9
  lines w0.254: -20.5,-100 -12,-100 -12,-97 12,-97 12,-100 20.5,-100 20.5,-68 10,-68 10,-52 15.5,-52 15.5,-36 -15.5,-36 -15.5,-52 -20.5,-52 -20.5,-100

## Silkscreen, mask and mechanical layers (free items; w line width, h text height)
Top Overlay:
  circle w0.254: c17,-72 r2
  circle w0.254: c-13,-39 r2
  circle w0.254: c13,-39 r2
  circle w0.254: c-17,-55 r2
  circle w0.254: c17,-96 r2
  circle w0.254: c-17,-96 r2
  lines w0.15: -4.826,-34.55 4.826,-34.55
  text "DS131-1.0-A" at 12.446,-99.441 h1.5
Bottom Overlay:
  circle w0.254: c17,-72 r2.5
  circle w0.254: c-13,-39 r2
  circle w0.254: c13,-39 r2
  circle w0.254: c-17,-55 r2.5
  circle w0.254: c17,-96 r2.5
  circle w0.254: c-17,-96 r2.5
Mechanical 1:
  circle w0.254: c17,-72 r0.9
  circle w0.254: c-13,-39 r0.9
  circle w0.254: c13,-39 r0.9
  circle w0.254: c-17,-55 r0.9
  circle w0.254: c17,-96 r0.9
  circle w0.254: c-17,-96 r0.9
  lines w0.254: -20.5,-100 -12,-100 -12,-97 12,-97 12,-100 20.5,-100 20.5,-68 10,-68 10,-52 15.5,-52 15.5,-36 -15.5,-36 -15.5,-52 -20.5,-52 -20.5,-100
Mechanical 15:
  circle w0.254: c0,-79.5 r0.6
  circle w0.254: c0,-71.5 r0.6
  circle w0.254: c0,-63.5 r0.6
  circle w0.254: c0,-55.5 r1.5
  lines w0.508: -16,-51 16,-51

## Text inside footprints (layer, text, board x,y; h text height)
C0: Top Overlay "+" at -9.271,-46.355 h1 r180